# EAGLE board AUX power board (V3.4) (EAGLE 7.5.0)
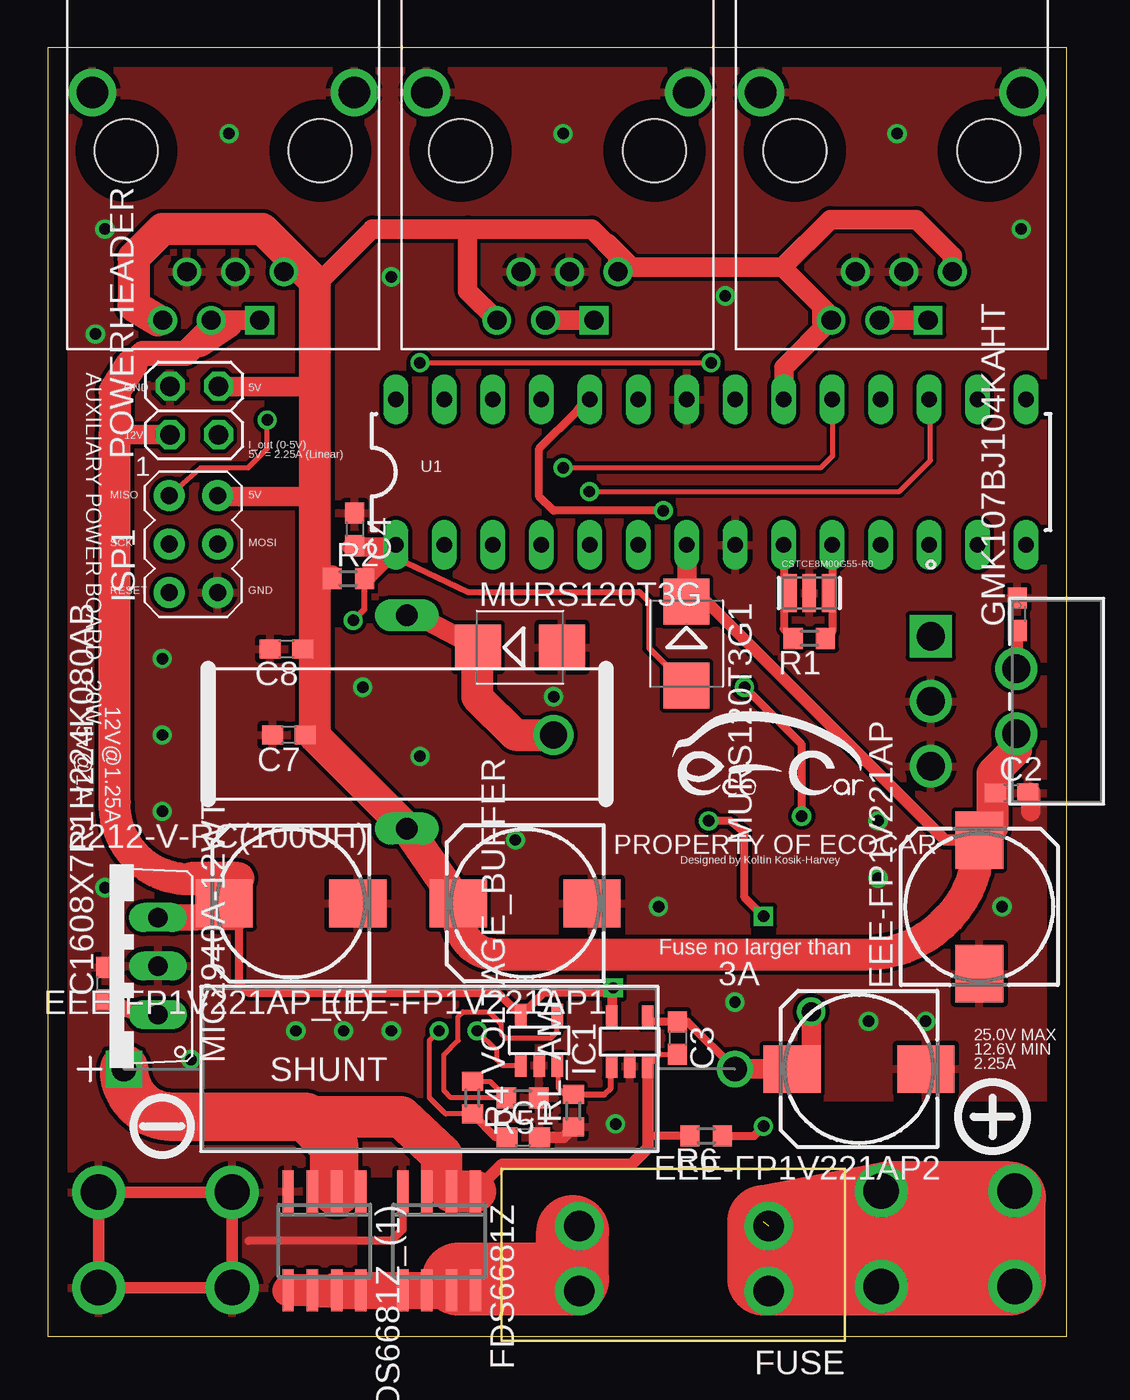
[diagram p0: board, top side]
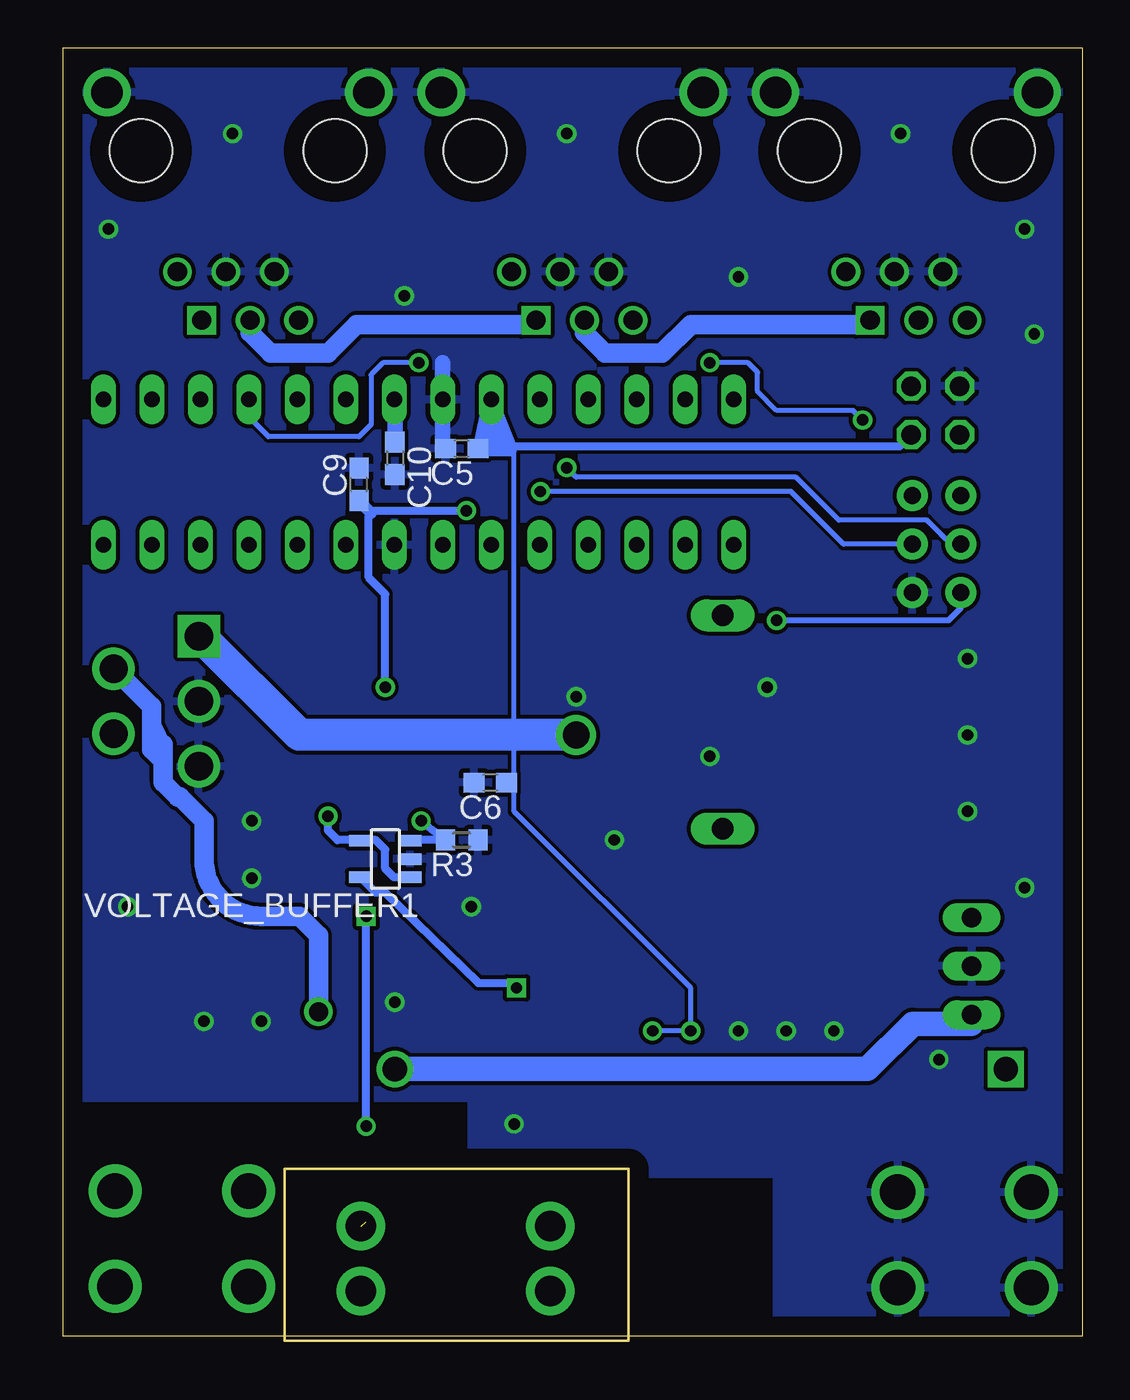
[diagram p1: board, bottom side, seen from below]

Size 53.38 x 67.5 mm. Coordinates in mm from the lower left corner, seen from the top.
Outline: 0,0 53.38,0 53.38,67.5 0,67.5 0,0
Copper layers (1*16): Top 0.035mm / dielectric 1.5mm / Bottom 0.035mm
Design rules "default": minimum track width 10mil, minimum drill 24mil, track to track 8mil, track to pad 8mil, pad to pad 8mil, via to via 8mil, smd to smd 8mil, copper to edge 40mil, drill to drill 8mil, minimum pad ring 10mil, minimum via ring 8mil, stop-mask expansion 4mil, vias tented up to drill 0mil, thermal gap 10mil

## Footprints (pad centres in the part's own frame; a part is rotated, then mirrored left to right if it is on the bottom)
T05D = drill 1.473 pad 1.981 square: 1 -6.807,-13.183 | drill 1.473 pad 1.981: 2 -5.105,-8.712; 3 -3.404,-13.183; 4 -1.702,-8.712; 5 0,-13.183
RES_15 = drill 1.27 pad 1.778 square: 1 -32.004,0 | drill 1.27 pad 1.778: 2 0,0
SFT1030 = drill 1.118 long: 1 -5.588,0; 2 5.588,0
C0603 = smd 1.1 x 1: 1 -0.85,0; 2 0.85,0
RESONATOR = smd 0.7 x 2: 1 -1,0; 2 0,0; 3 1,0
175TMP-0808 = smd 3 x 2.5: + 3.5,0; - -3.5,0
SO-08 = smd 0.6 x 2.2: 1 -1.905,-2.6; 2 -0.635,-2.6; 3 0.635,-2.6; 4 1.905,-2.6; 5 1.905,2.6; 6 0.635,2.6; 7 -0.635,2.6; 8 -1.905,2.6
SOT23-5 = smd 0.6 x 1.2: 1 -0.95,-1.306; 2 0,-1.306; 3 0.95,-1.306; 4 0.95,1.306; 5 -0.95,1.306
AVRISP = drill 0.9 pad 1.626: 1 -1.27,2.54; 2 1.27,2.54; 3 -1.27,0; 4 1.27,0; 5 -1.27,-2.54; 6 1.27,-2.54
TO220V = drill 1.016 long: 1 -2.54,-2.54; 2 0,-2.54; 3 2.54,-2.54
3568 = drill 1.6 pad 2.54: L1 0,3.4; L2 0,0; R1 9.92,3.4; R2 9.92,0
SMB = smd 2.4 x 2.4: A 2.2,0; C -2.2,0
2X02 = drill 1.016 octagon: 1 -1.27,-1.27; 2 -1.27,1.27; 3 1.27,-1.27; 4 1.27,1.27
R0603 = smd 1 x 1.1: 1 -0.85,0; 2 0.85,0
DIL28-3 = drill 0.813 long: 1 -16.51,-3.81; 2 -13.97,-3.81; 3 -11.43,-3.81; 4 -8.89,-3.81; 5 -6.35,-3.81; 6 -3.81,-3.81; 7 -1.27,-3.81; 8 1.27,-3.81; 9 3.81,-3.81; 10 6.35,-3.81; 11 8.89,-3.81; 12 11.43,-3.81; 13 13.97,-3.81; 14 16.51,-3.81; 15 16.51,3.81; 16 13.97,3.81; 17 11.43,3.81; 18 8.89,3.81; 19 6.35,3.81; 20 3.81,3.81; 21 1.27,3.81; 22 -1.27,3.81; 23 -3.81,3.81; 24 -6.35,3.81; 25 -8.89,3.81; 26 -11.43,3.81; 27 -13.97,3.81; 28 -16.51,3.81
1734723-1_RJ11 = drill 1 square: 1 -2.54,2.54 | drill 1: 2 0,2.54; 3 2.54,2.54; 4 -3.81,0; 5 -1.27,0; 6 1.27,0 | drill 1.65: SH1 -7.5,-9.4; SH2 6.22,-9.4 | hole 3.3: -5.72,-6.35; 4.44,-6.35
SCREW-8191 = drill 1.85: P$1 0,0; P$2 0,5; P$3 7,5; P$4 7,0

## Placement (x,y rotation side)
5V_REGULATOR  LM2595T-5.0/NOPB  [T05D]  59.45,29.86 270 top
15FR005E  15FR005E  [RES_15]  36,14 0 top
2212-V-RC(100UH)  SFT1030  [SFT1030]  18.82,32.18 90 top
C1  2.2uF  [C0603]  24.91,10.44 0 top
C2  0.1uF  [C0603]  50.49,28.46 0 top
C3  2.2uF  [C0603]  33,15.62 270 top
C4  0.1uF  [C0603]  16.09,42.28 270 top
C5  2.2uF  [C0603]  32.5,46.5 180 bottom
C6  2.2uF  [C0603]  31,29 180 bottom
C7  2.2uF  [C0603]  12.62,31.5 180 top
C8  2.2uF  [C0603]  12.5,36 180 top
C9  2.2uF  [C0603]  37.88,44.62 90 bottom
C10  0.1uF  [C0603]  36,46 270 bottom
C1608X7R1H224K080AB  0.22uF  [C0603]  3.04,18.48 90 top
CSTCE8M00G55-R0  CSTCE16M0V53-R0  [RESONATOR]  39.9,38.94 0 top
EEE-FP1V221AP  220uF  [175TMP-0808]  48.8,22.5 90 top
EEE-FP1V221AP1  220uF  [175TMP-0808]  25.02,22.68 180 top
EEE-FP1V221AP2  220uF  [175TMP-0808]  42.5,14 180 top
EEE-FP1V221AP_(1)  220uF  [175TMP-0808]  12.74,22.67 180 top
FDS6681Z  [SO-08]  20.5,5 180 top
FDS6681Z_(1)  [SO-08]  14.5,5 180 top
GMK107BJ104KAHT  0.1uF  [C0603]  50.79,37.83 90 top
IC1  INA138  [SOT23-5]  30.49,15.44 0 top
ISP1  AVRISP-6  [AVRISP]  7.62,41.5 0 top
MIC2940A-12WT  7805TV  [TO220V]  3.24,19.39 90 top
MINIBLADE  3568  [3568]  37.77,5.77 180 top
MURS120T3G  MBRS130LT3  [SMB]  24.74,36.09 0 top
MURS120T3G1  MBRS130LT3  [SMB]  33.47,36.29 270 top
POWERHEADER  [2X02]  7.68,48.5 90 top
R1  1M  [R0603]  39.9,36.56 180 top
R2  4.7k  [R0603]  15.74,39.69 0 top
R3  10k  [R0603]  32.5,26 180 bottom
R4  40k  [R0603]  22.25,12.5 270 top
R5  10k  [R0603]  24.88,12.5 180 top
R6  40k  [R0603]  34.5,10.5 180 top
RL_AMP  442k  [R0603]  27.54,11.81 90 top
U1  ATMEGA328P_PDIP  [DIL28-3]  34.75,45.27 0 top
U$1  [LOGO]  38.12,30.12 0 top
U$3  5555140-6  [1734723-1_RJ11]  8.56,55.76 180 top
U$4  5555140-6  [1734723-1_RJ11]  26.07,55.76 180 top
U$5  5555140-6  [1734723-1_RJ11]  43.58,55.76 180 top
U$6  SCREW-8191  [SCREW-8191]  50.66,7.61 180 top
U$7  SCREW-8191  [SCREW-8191]  2.66,2.55 0 top
VOLTAGE_BUFFER  OPA340N  [SOT23-5]  25.74,15.5 0 top
VOLTAGE_BUFFER1  OPA340N  [SOT23-5]  36.5,25 90 bottom

## Library data of the parts
5V_REGULATOR = LM2595T-5; COPYRIGHT: Copyright C 2015 Accelerated Designs. All rights reserved; MANUFACTURER_PART_NUMBER: LM2595T50; VENDOR: National Semiconductor
15FR005E = 15FR005E; COPYRIGHT: Copyright C 2015 Accelerated Designs. All rights reserved; MANUFACTURER_PART_NUMBER: 15FR005E; VENDOR: Ohmite
2212-V-RC(100UH) = inductors
C1 C2 C10 R2-R6 RL_AMP = resistor
C3-C9 EEE-FP1V221AP EEE-FP1V221AP1 EEE-FP1V221AP2 EEE-FP1V221AP_(1) GMK107BJ104KAHT R1 = rcl
C1608X7R1H224K080AB = eagle-ltspice; SPICEMODEL: NONE; SPICEPREFIX: C
CSTCE8M00G55-R0 = arduino_Uno_Rev3-02-TH
FDS6681Z FDS6681Z_(1) = transistor-power
IC1 = burr-brown; MF: TEXAS INSTRUMENTS; MPN: INA138NA/250; OC_FARNELL: 1564888; OC_NEWARK: 80K5906
ISP1 = adafruit
MIC2940A-12WT = linear
MINIBLADE = fuse
MURS120T3G MURS120T3G1 = diode
POWERHEADER = pinhead
U1 = SparkFun-DigitalIC
U$1 = Shell2015
U$3-U$5 = 5555140-6 RJ11
U$6 U$7 = Shell2013
VOLTAGE_BUFFER VOLTAGE_BUFFER1 = burr-brown; MPN: OPA340NA/3KG4; OC_FARNELL: 1234805; OC_NEWARK: 13M5177

## Nets
BATTERY_IN_UNFUSED+: MINIBLADE.L1 MINIBLADE.L2 U$6.P$1 U$6.P$2 U$6.P$3 U$6.P$4
FUSED_BATTERY_IN+: 15FR005E.1 C3.2 FDS6681Z.1 FDS6681Z.2 FDS6681Z.3 FDS6681Z_(1).1 FDS6681Z_(1).2 FDS6681Z_(1).3 IC1.3 R6.2
GND: 5V_REGULATOR.3 5V_REGULATOR.5 C1.2 C2.2 C4.1 C5.2 C6.2 C7.2 C8.2 C9.2 C10.2 C1608X7R1H224K080AB.2 CSTCE8M00G55-R0.2 EEE-FP1V221AP1.- EEE-FP1V221AP2.- EEE-FP1V221AP.- EEE-FP1V221AP_(1).- FDS6681Z.4 FDS6681Z_(1).4 GMK107BJ104KAHT.2 IC1.2 ISP1.6 MIC2940A-12WT.2 MURS120T3G.A POWERHEADER.4 R3.1 R5.1 RL_AMP.1 U1.8 U1.22 U$3.5 U$3.6 U$3.SH1 U$3.SH2 U$4.5 U$4.6 U$4.SH1 U$4.SH2 U$5.5 U$5.6 U$5.SH1 U$5.SH2 U$7.P$1 U$7.P$2 U$7.P$3 U$7.P$4 VOLTAGE_BUFFER1.2 VOLTAGE_BUFFER.2
INPUT_UNREG: 5V_REGULATOR.2 15FR005E.2 C3.1 C1608X7R1H224K080AB.1 EEE-FP1V221AP2.+ GMK107BJ104KAHT.1 IC1.4 MIC2940A-12WT.1
INT0: U1.4
MEASUREMENT_OUT: C1.1 C5.1 C6.1 POWERHEADER.1 R4.2 U1.23 VOLTAGE_BUFFER.1
MISO: ISP1.1 U1.18
MMM: FDS6681Z.5 FDS6681Z.6 FDS6681Z.7 FDS6681Z.8 FDS6681Z_(1).5 FDS6681Z_(1).6 FDS6681Z_(1).7 FDS6681Z_(1).8 MINIBLADE.R1 MINIBLADE.R2
MOSI: ISP1.4 U1.17
N$1: 5V_REGULATOR.1 2212-V-RC(100UH).2 MURS120T3G.C
N$2: R4.1 R5.2 VOLTAGE_BUFFER.4
N$3: IC1.1 RL_AMP.2 VOLTAGE_BUFFER.3
N$11: C9.1 U1.24 VOLTAGE_BUFFER1.1 VOLTAGE_BUFFER1.4
N$12: R3.2 R6.1 VOLTAGE_BUFFER1.3
N$14: C10.1 U1.21
N$18: CSTCE8M00G55-R0.1 R1.2 U1.9
N$19: CSTCE8M00G55-R0.3 R1.1 U1.10
OUTPUT_5REG: 5V_REGULATOR.4 2212-V-RC(100UH).1 C2.1 C7.1 C8.1 EEE-FP1V221AP1.+ EEE-FP1V221AP.+ ISP1.2 MURS120T3G1.C POWERHEADER.3 R2.1 U1.7 U1.20 U$3.3 U$3.4 U$4.3 U$4.4 U$5.3 U$5.4
OUTPUT_12REG: EEE-FP1V221AP_(1).+ IC1.5 MIC2940A-12WT.3 POWERHEADER.2 U$3.1 U$3.2 U$4.1 U$4.2 U$5.1 U$5.2 VOLTAGE_BUFFER1.5 VOLTAGE_BUFFER.5
RESET: C4.2 ISP1.5 MURS120T3G1.A R2.2 U1.1
RXD: U1.2
SCK: ISP1.3 U1.19
SCL: U1.28
SDA: U1.27
SS: U1.16
TXD: U1.3

## Tracks (layer width: path | path; a pad name or v marks a point on that pad's centre or on a via)
BATTERY_IN_UNFUSED+  (1 unrouted)
  Top 0.813: MINIBLADE.L2 MINIBLADE.L1 43.66,2.37 U$6.P$3
  Top 3.81: 37.5,6 37.5,3 43.5,3 | 43.5,3 50.38,3 50.38,7.25 44,7.25 | 44,7.25 44,4.88 47.5,4.88 | 37.5,6 43.5,3 | 37.5,6 44,7.25
FUSED_BATTERY_IN+
  Top 0.254: IC1.3 32.08,14.78 C3.2 | FDS6681Z.3 20.62,8.23
  Top 0.406: R6.2 31.44,10.5
  Top 0.61: IC1.3 31.44,10.5 31.44,9.86 30.58,9 23.8,9 FDS6681Z.1 | 15,7.74 FDS6681Z_(1).3 | FDS6681Z_(1).2 FDS6681Z_(1).1
  Top 2.184: FDS6681Z.1 FDS6681Z.2 20.62,8.23 20.62,9.5 18.5,11.5 12.5,11.5
  Top 2.54: 15FR005E.1 arc90 6.5,11.5 12.5,11.5 13.5,11.5 15,10 15,7.74 FDS6681Z_(1).2
GND  (via drill 0.6)
  Top 0.406: FDS6681Z.4 18.59,5.59 18,5 10.5,5
  Top 0.61: C1.2 27.01,10.44 RL_AMP.1
  Top 1.016: 51.5,28.5 51.5,27.5
  Bottom 0.813: 33.5,46.5 33.5,51
  other vias: 43,16.5 46,16.5 50,22.5 36,17.5 13,16 18,16 7.5,14.5 15.5,16 3,23.5 6,27.5 43.5,24 32,22.5 29.75,11.12 19.5,30.38 51,58 3,58 27,63 44.5,63 9.5,63 43.5,27 24.5,26 26.5,33.5 16.5,34 6,31.5 6,35.5 18,55.5 35.5,54.5 2.5,52.5
  pour Top: -0.5,68 55.5,68 55.5,12.5 32,12.5 32,8.5 16,8.5 16,-2 -0.5,-2
  pour Bottom: -1,68.5 56,68.5 56,12.5 32,12.5 32,8.5 16,8.5 16,-2.5 -1,-2.5
INPUT_UNREG  (via drill 1)
  Top 0.254: C3.1 33.52,16.48 | 31.71,16.48 IC1.4 31.44,16.56 31.5,16.5 | 4.83,16.85 MIC2940A-12WT.1
  Top 0.406: 33.52,16.48 15FR005E.2 | C3.1 31.71,16.48
  Top 0.61: GMK107BJ104KAHT.1 50.79,35.02 5V_REGULATOR.2 | EEE-FP1V221AP2.+ 39.5,14 40,14.5
  Top 0.813: C1608X7R1H224K080AB.1 4.83,16.85
  Top 1.016: 15FR005E.2 EEE-FP1V221AP2.+ | 40,14.5 v40,17
  Bottom 1.016: 5.8,16.38 MIC2940A-12WT.1 | v40,17 40,21 41,22 43,22 arc90 46,25 46,27 47.25,28.25 47.38,28.25 48.12,29 48.12,30.12 | 48.12,30.12 48.75,30.75 48.75,32 | 48.75,32 48.75,33 50.72,34.97 5V_REGULATOR.2 | 48.12,30.75 48.75,32 | 48.12,31 48.12,30.12
  Bottom 1.27: 15FR005E.2 11.25,14 8.88,16.38 5.8,16.38
MEASUREMENT_OUT  (via drill 0.6)
  Top 0.254: 23.84,10.65 C1.1 23.46,10.44 | R4.2 20.85,11.65 20,12.5 20,15.5 v20.5,16 | v22.5,16 23.5,15 23.5,14.5 23.81,14.19 VOLTAGE_BUFFER.1
  Top 0.406: R4.2 23.46,10.44
  Bottom 0.254: v22.5,16 v20.5,16 20.5,18.25 29.75,27.5 29.75,29 | 29.75,29 29.75,46.5 | 29.75,46.5 29.75,46.62 30.88,47.75 30.88,49.02 U1.23 | C5.1 31.5,46.5 31,46.5 | 30,46.5 29.75,46.5 | C6.1 29.75,29
  Bottom 0.406: 29.75,46.62 9.55,46.62 POWERHEADER.1
  Bottom 0.813: 31.5,46.5 31,49 | 31,49 31,46.5 30,46.5 31,49
MISO  (via drill 0.6)
  Top 0.254: ISP1.1 8,45.5 10.5,45.5 11.5,46.5 v11.5,48 | v19.5,51 v34.75,51
  Bottom 0.254: v11.5,48 12,48.5 16,48.5 17,49.5 17,50.5 17.5,51 v19.5,51 | v34.75,51 36.62,51 37.25,50.38 37.25,47.75 37.88,47.12 42.62,47.12 43.64,48.14 U1.18
MMM
  Top 0.813: MINIBLADE.R2 MINIBLADE.R1
  Top 1.676: 13.89,2.37 FDS6681Z_(1).6 FDS6681Z_(1).5 | 13.89,2.37 MINIBLADE.R1 | 13.89,2.37 13.93,2.4 FDS6681Z_(1).7 | FDS6681Z.7 FDS6681Z.8
  Top 1.93: FDS6681Z_(1).7 FDS6681Z_(1).8 FDS6681Z.5 FDS6681Z.6 FDS6681Z.7
MOSI  (via drill 0.6)
  Top 0.254: v28.38,44.25 44.62,44.25 46.25,45.88 46.25,49.01 U1.17
  Bottom 0.254: ISP1.4 12.5,41.5 15.25,44.25 v28.38,44.25
N$1  (via drill 1.4 pad 1.78)
  Top 1.016: 2212-V-RC(100UH).2 19.36,37.77 MURS120T3G.C
  Top 1.676: MURS120T3G.C 22.5,36.09 22.5,33.5 24.5,31.5 v26.5,31.5
  Bottom 1.676: v26.5,31.5 41,31.5 46.17,36.67 5V_REGULATOR.1
N$2
  Top 0.254: 23.88,12.35 R5.2 | R5.2 21.12,12.5 20.75,12.88 20.75,14.75 21.5,15.5 21.5,16.75 21.75,17 23.12,17 23.75,16.38 23.75,15.88 24,15.62 26.38,15.62 26.69,15.94 VOLTAGE_BUFFER.4 | R4.1 23.18,13.35 R5.2
N$3
  Top 0.254: 29.5,14.09 IC1.1 | RL_AMP.2 27.09,12.66 26.75,13 26.75,14.13 VOLTAGE_BUFFER.3
  Top 0.305: RL_AMP.2 29.16,12.66 29.5,13 29.5,14.09
N$5
  Top 3.81: 21.5,3 27.5,3 27.5,5.5
N$6
  Top 1.676: 11.75,57.5 14,55.25
N$10
  Top 0.406: 40.25,54.5 40.25,52.62
N$11  (via drill 0.6)
  Top 0.406: v39.5,27.25 39.5,31 v36.5,34 | v32.25,43.25 26.5,43.25 25.75,44 25.75,46.5 27.75,48.5 27.82,48.5
  Top 0.61: 27.82,48.5 U1.24
  Bottom 0.406: VOLTAGE_BUFFER1.1 36.05,24.05 36.5,24.5 36.5,25.5 37,26 37.76,26 | 37.76,26 VOLTAGE_BUFFER1.4 | 37.76,26 39,26 39.5,26.5 v39.5,27.25 | v36.5,34 36.5,38.88 37.38,39.75 37.38,43 37.25,43.12 37.12,43.25 v32.25,43.25
  Bottom 0.61: C9.1 37.25,43.12
N$12  (via drill 0.6)
  Top 0.406: R6.1 37,10.5 v37.5,11 | v37.5,22 36.5,23 36.5,26.38 35.75,27 v34.62,27
  Bottom 0.406: VOLTAGE_BUFFER1.3 35.14,26 R3.2 33.98,26.48 v34.62,27 | v37.5,11 v37.5,22
N$13
  Top 1.422: 8,52 9.5,53
N$14
  Bottom 0.813: C10.1 U1.21
N$18
  Top 0.406: U1.9 38.56,39 | 38.56,39 38.56,37.05 R1.2 | CSTCE8M00G55-R0.1 38.62,38.94 38.56,39
N$19
  Top 0.406: U1.10 41.1,39 | 41.1,39 41.1,36.91 R1.1 | CSTCE8M00G55-R0.3 41.03,38.94 41.1,39
OUTPUT_5REG
  Top 0.406: 33.5,38.5 34.5,38.5 | 29.5,57.5 31,56
  Top 0.61: 34.5,38.5 47,26 EEE-FP1V221AP.+ | C7.1 14,31.41 | C8.1 14,36
  Top 1.016: EEE-FP1V221AP1.+ 21.52,21.98 | EEE-FP1V221AP.+ 49.5,26.69 | 50.74,30.74 5V_REGULATOR.4 | C2.1 49.6,29 49.5,29 | 5.78,53.22 U$3.3 | 22,58 17,58 14,55 13.24,55.76 U$3.4 12.37,56.88 | 22,58 28.5,58 29.88,56.62 U$4.4 30.12,56 31,56 38.5,56 | U$4.3 22,54.75 22,58 | 38.5,56 41,58.5 45.5,58.5 47.39,56.61 U$5.4 | 38.5,56 41.04,53.46 U$5.3 38.56,50.74 U1.20 | MURS120T3G1.C 33.48,38.51 U1.7 33.5,41.44 33.5,38.5 | POWERHEADER.3 8.95,49.75 14,49.75 | ISP1.2 8.89,44 14,44 | R2.1 14.89,39.88 14,39.88
  Top 1.676: EEE-FP1V221AP1.+ 2212-V-RC(100UH).1 14,31.41 14,36 14,39.88 14,44 14,49.75 14,55 | 21.52,21.98 arc90 23.5,20 42.81,20 arc90 EEE-FP1V221AP.+ | 49.5,26.69 49.5,29 49.5,29.5 50.74,30.74 | 5.78,53.22 4.5,54 4.5,56.5 6,58 11.26,58 12.37,56.88
OUTPUT_12REG  (via drill 0.6)
  Top 0.254: EEE-FP1V221AP_(1).+ 10,24
  Top 0.406: v29.62,18.25 29.62,16.83 IC1.5 29.54,17.96 29.5,18 25.98,18 VOLTAGE_BUFFER.5 23.6,18 10.5,18 10,18.5 10,22
  Top 1.016: U$4.2 U$4.1 | U$3.1 U$3.2 8.56,53.06 | U$5.2 U$5.1 | 3.5,47.25 3.52,47.23 POWERHEADER.2 | 7.96,23.95 arc-90 8,24 10,24
  Top 1.3: 4.38,50.88 5,51.5 7.25,51.5 8.56,52.81
  Top 1.422: MIC2940A-12WT.3 10,22 EEE-FP1V221AP_(1).+ | 8.56,52.81 U$3.2
  Top 1.676: 4.38,50.88 3.5,49.5 3.5,47.25 3.5,28.12 arc90 7.17,23.95 7.96,23.95 | 10,24 7.5,24
  Bottom 0.406: VOLTAGE_BUFFER1.5 37.01,23.25 36.5,23.25 31.62,18.5 29.88,18.5 v29.62,18.25
  Bottom 1.016: U$3.1 11.32,53 20.5,53 22,51.5 25,51.5 26.07,52.57 U$4.2 | U$4.1 28.83,53 38,53 39.5,51.5 42.5,51.5 43.58,52.58 U$5.2
RESET  (via drill 0.6)
  Top 0.305: 18.24,41.34 18.24,40.76 22,39 31,39 31.5,38.5 31.5,36.05 MURS120T3G1.A | v16,37.5 16.59,38.09 R2.2
  Top 1.016: U1.1 18.24,41.34 | 18.24,41.34 R2.2 | 18.24,41.34 15.94,41.34 C4.2
  Bottom 0.305: ISP1.5 6.36,38.15 7,37.5 v16,37.5
SCK  (via drill 0.6)
  Top 0.254: v27,45.5 40.5,45.5 41.12,46.12 41.12,49.05 U1.19
  Bottom 0.254: ISP1.3 6.88,41.5 8.12,42.75 12.75,42.75 15,45 26.5,45 v27,45.5

## Text on the board
tPlace: AUXILIARY POWER BOARD - 20W | GND | 5V | 12V | 5V = 2.25A (Linear) | I_out (0-5V) | MISO | 5V | SCK | MOSI | RESET | GND | 12V@1.25A | 5V@1A | PROPERTY OF ECOCAR | Designed by Koltin Kosik-Harvey | Fuse no larger than | 3A | 25.0V MAX | 12.6V MIN | 2.25A